# EAGLE board 0.91inch_128x32_oled_i2c_EVM_v1.0_Eagle_v7.X (EAGLE 7.7.0)
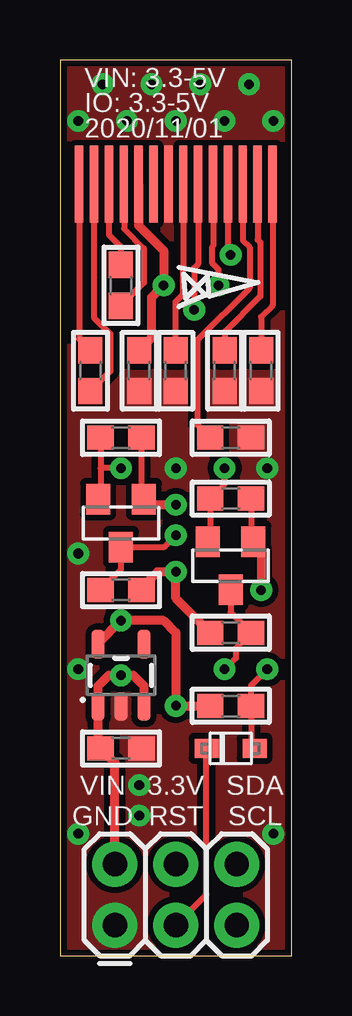
[diagram p0: board, top side]
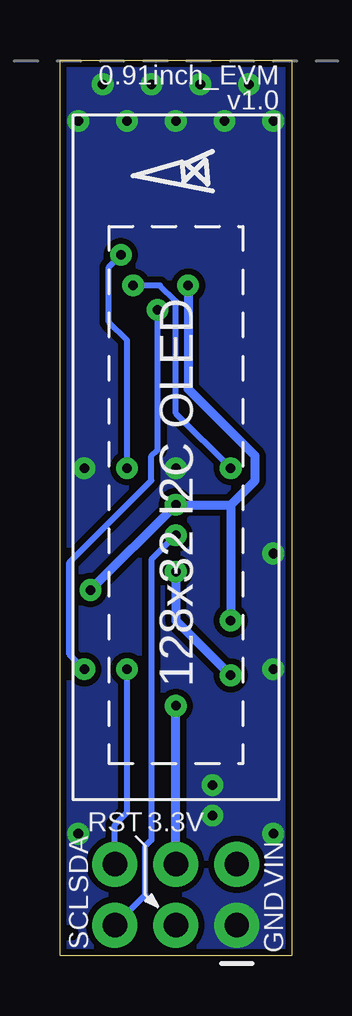
[diagram p1: board, bottom side, seen from below]

Size 9.65 x 37.34 mm. Coordinates in mm from the lower left corner, seen from the top.
Outline: 9.65,37.34 0,37.34 0,0 9.65,0 9.65,37.34
Copper layers (1*16): Top 0.035mm / dielectric 1.5mm / Bottom 0.035mm
Design rules "default *": minimum track width 8mil, minimum drill 0.4mm, track to track 6mil, track to pad 6mil, pad to pad 6mil, via to via 6mil, smd to smd 6mil, copper to edge 10mil, drill to drill 8mil, minimum pad ring 8mil, minimum via ring 10mil, stop-mask expansion 3mil, vias tented up to drill 20mil, thermal gap 8mil
bRestrict: area 9,-1.1 to 9.7,-1; area 9.1,0.9 to 9.7,1

## Footprints (pad centres in the part's own frame; a part is rotated, then mirrored left to right if it is on the bottom)
0603 = smd 1.1 x 1: 1 -0.85,0; 2 0.85,0
SOD-323F = smd 1 x 0.8: A -1,0; C 1,0
2X3 = drill 1.016 pad 1.88: 1 0,0; 2 0,2.54; 3 2.54,0; 4 2.54,2.54; 5 5.08,0; 6 5.08,2.54
0.91INCH_128X32_OLED_CH1115 = smd 3.2 x 0.35 bottom: 1 -2.888,-4.03; 2 -2.888,-3.41; 3 -2.888,-2.79; 4 -2.888,-2.17; 5 -2.888,-1.55; 6 -2.888,-0.93; 7 -2.888,-0.31; 8 -2.888,0.31; 9 -2.888,0.93; 10 -2.888,1.55; 11 -2.888,2.17; 12 -2.888,2.79; 13 -2.888,3.41; 14 -2.888,4.03
SOT23-WIDE = smd 1 x 1.27: 1 -0.95,-1; 2 0.95,-1; 3 0,1
SOT23-5 = smd 0.55 x 1.2: 1 -0.95,-1.3; 2 0,-1.3; 3 0.95,-1.3; 4 0.95,1.3; 5 -0.95,1.3

## Placement (x,y rotation side)
C1  1uF  [0603]  1.27,24.38 90 top
C2  1uF  [0603]  2.54,27.94 90 top
C3  1uF  [0603]  3.3,24.38 90 top
C4  1uF  [0603]  4.83,24.38 90 top
C5  10uF  [0603]  8.38,24.38 90 top
C6  10uF  [0603]  6.86,24.38 90 top
C7  10uF  [0603]  2.54,8.64 0 top
D1  1N4148  [SOD-323F]  7.11,8.64 180 top
FRAME2  FRAME-LETTER  [CREATIVE_COMMONS]  -26.92,-11.43 0 top  (outside the outline)
J1  FEMALE 2x3  [2X3]  2.29,1.27 0 top
LCD1  [0.91INCH_128X32_OLED_CH1115]  4.83,35.05 90 bottom
Q1  BSS138  [SOT23-WIDE]  7.11,16.26 180 top
Q2  BSS138  [SOT23-WIDE]  2.54,18.03 180 top
R3  390K  [0603]  7.11,21.59 180 top
R4  10K  [0603]  7.11,19.05 0 top
R5  10K  [0603]  7.11,10.41 180 top
R7  10K  [0603]  2.54,21.59 0 top
R8  10K  [0603]  7.11,13.46 180 top
R9  10K  [0603]  2.54,15.24 0 top
U$6  [SOT23-5]  2.54,11.68 0 top

## Library data of the parts
C1-C7 Q1 Q2 R3-R5 R7-R9 = microbuilder
D1 = adafruit
FRAME2 = SparkFun-Aesthetics
J1 = SparkFun-Connectors; PROD_ID: CONN-11566
LCD1 = FUSB302
U$6 = SparkFun-IC-Power

## Nets
3.3V: C3.2 J1.4 LCD1.5 Q1.1 Q2.1 R4.2 R5.2 R7.2 U$6.5
GND: C3.1 C4.1 C5.1 C6.1 C7.2 J1.1 LCD1.7 R3.1 U$6.2
N$1: C1.2 LCD1.1
N$2: C1.1 LCD1.2
N$3: C2.2 LCD1.3
N$4: C2.1 LCD1.4
N$5: C6.2 LCD1.13
N$6: C5.2 LCD1.14
N$7: LCD1.12 R3.2
N$8: C4.2 LCD1.8
RES_3.3V: D1.A LCD1.9 R5.1
RES_5.0V: D1.C J1.3
SCL_3.3V: LCD1.10 Q2.2 R7.1
SCL_5.0V: J1.5 Q2.3 R9.1
SDA_3.3V: LCD1.11 Q1.2 R4.1
SDA_5.0V: J1.6 Q1.3 R8.1
VBREF: LCD1.6
VIN: C7.1 J1.2 R8.2 R9.2 U$6.1 U$6.3

## Tracks (layer width: path | path; a pad name or v marks a point on that pad's centre or on a via)
3.3V  (via drill 0.4)
  Top 0.254: R7.2 3.39,19.13 Q2.1 | R4.2 7.96,17.36 Q1.1
  Top 0.381: LCD1.5 3.28,30.43 4.32,29.39 v4.32,27.94 3.81,27.43 3.81,25.74 C3.2 | U$6.5 1.59,13.02 v2.54,13.97 4.32,13.97 4.83,13.46 v4.83,10.41 R5.2 | Q2.1 3.73,18.8 v4.83,18.8 | Q1.1 8.38,16.94 v8.38,15.24
  Bottom 0.381: v4.32,27.94 4.32,23.62 1.52,20.83 1.52,19.81 2.54,18.8 | 2.54,18.8 v2.54,13.97 | 2.54,18.8 v4.83,18.8 v8.38,15.24 | J1.4 v4.83,10.41
GND  (via drill 0.4)
  other vias: 8.64,20.32 4.83,20.32 4.83,34.8 5.84,36.32 3.81,36.32 6.86,34.8 7.87,36.32 8.89,34.8 2.79,34.8 0.76,34.8 1.78,36.32 0.76,16.76 8.89,5.08 3.3,7.11 0.76,5.08 3.3,5.84 0.76,11.94
  pour Bottom (isolate 0.254, no thermals): -0.51,-1.52 10.59,-1.52 10.59,38.32 -0.51,38.32
  pour Top (isolate 0.254, no thermals): -0.51,-1.52 10.59,-1.52 10.59,38.32 -0.51,38.32
N$1
  Top 0.254: LCD1.1 0.8,25.71 C1.2
N$2
  Top 0.254: LCD1.2 1.42,26.61 2.1,25.92 2.1,24.36 C1.1
N$3
  Top 0.254: LCD1.3 2.04,30.06 2.54,29.55 C2.2
N$4
  Top 0.254: LCD1.4 2.67,32.15 2.67,30.31 3.5,29.48 3.5,28.05 C2.1
N$5
  Top 0.254: LCD1.13 8.24,29.84 8.35,29.72 8.35,27.49 6.86,26 C6.2
N$6
  Top 0.254: LCD1.14 8.86,27.11 8.38,26.63 C5.2
N$7
  Top 0.254: LCD1.12 7.62,29.82 7.9,29.54 7.9,27.84 5.71,25.65 5.71,22.14 R3.2
N$8
  Top 0.254: C4.2 4.8,25.26 4.8,27.25 5.11,27.55 5.11,28.71 5.14,28.74 LCD1.8
RES_3.3V  (via drill 0.4)
  Top 0.254: LCD1.9 5.76,28.84 5.59,28.67 v5.59,26.92 | D1.A 7.96,8.79 R5.1 7.96,11.26 v8.64,11.94
  Bottom 0.254: v8.64,11.94 9.26,12.56 9.26,16.4 5.84,19.81 5.84,20.83 5.59,21.08 v5.59,26.92
RES_5.0V
  Top 0.254: D1.C 6.1,8.62 6.1,2.54 J1.3
SCL_3.3V  (via drill 0.4)
  Top 0.254: LCD1.10 6.38,29.58 6.33,29.54 6.33,28.89 6.6,28.61 v6.6,27.94 | Q2.2 1.69,19.13 R7.1 1.69,20.32 v2.54,20.32
  Bottom 0.254: v2.54,20.32 4.83,22.61 4.83,27.28 5.49,27.94 v6.6,27.94
SCL_5.0V  (via drill 0.4)
  Top 0.254: R9.1 2.54,16.09 Q2.3 2.56,17.02 4.32,17.02 v4.83,17.53
  Bottom 0.254: v4.83,17.53 5.84,16.51 5.84,4.83 6.1,4.57 6.1,2.54 J1.5
SDA_3.3V  (via drill 0.4)
  Top 0.254: LCD1.11 7,29.33 v7.11,29.21 | Q1.2 6.26,17.36 R4.1 6.86,19.65 v6.86,20.32
  Bottom 0.254: v7.11,29.21 7.62,28.7 7.62,26.42 6.86,25.65 v6.86,20.32
SDA_5.0V  (via drill 0.4)
  Top 0.254: Q1.3 7.11,14.31 R8.1 7.33,12.83 7.33,12.41 v6.86,11.94
  Bottom 0.254: J1.6 7.37,5.46 6.86,5.97 v6.86,11.94
VIN  (via drill 0.4)
  Top 0.381: J1.2 2.29,8.04 C7.1 1.59,8.74 U$6.1 1.59,11.24 2.03,11.68 v2.54,11.68 3.05,11.68 3.49,11.24 U$6.3 | R8.2 4.83,14.9 v4.83,16 4.06,16 3.39,15.33 R9.2
  Bottom 0.381: v4.83,16 4.83,13.97 v2.54,11.68

## Text on the board
tPlace: VIN: 3.3-5V / IO: 3.3-5V / 2020/11/01 | VIN | 3.3V | SDA | GND | RST | SCL
bPlace: 0.91inch_EVM / v1.0 | 128x32 I2C OLED | 3.3V | RST | VIN | SDA | GND | SCL
tDocu: OldGerman(过气德国佬)